# Altium PCB COIL-BOOST-10A.PcbDoc (part 4 of 5)
Units mm, origin at the board's own origin, x right, y up, seen from the top; angles counter-clockwise.
Board outline 80.1 x 100.1 mm, 4 copper layers (L1, L2, L3, L4), stack 1.512 mm thick; 282 components, 151 nets, 786 pads, 740 vias.
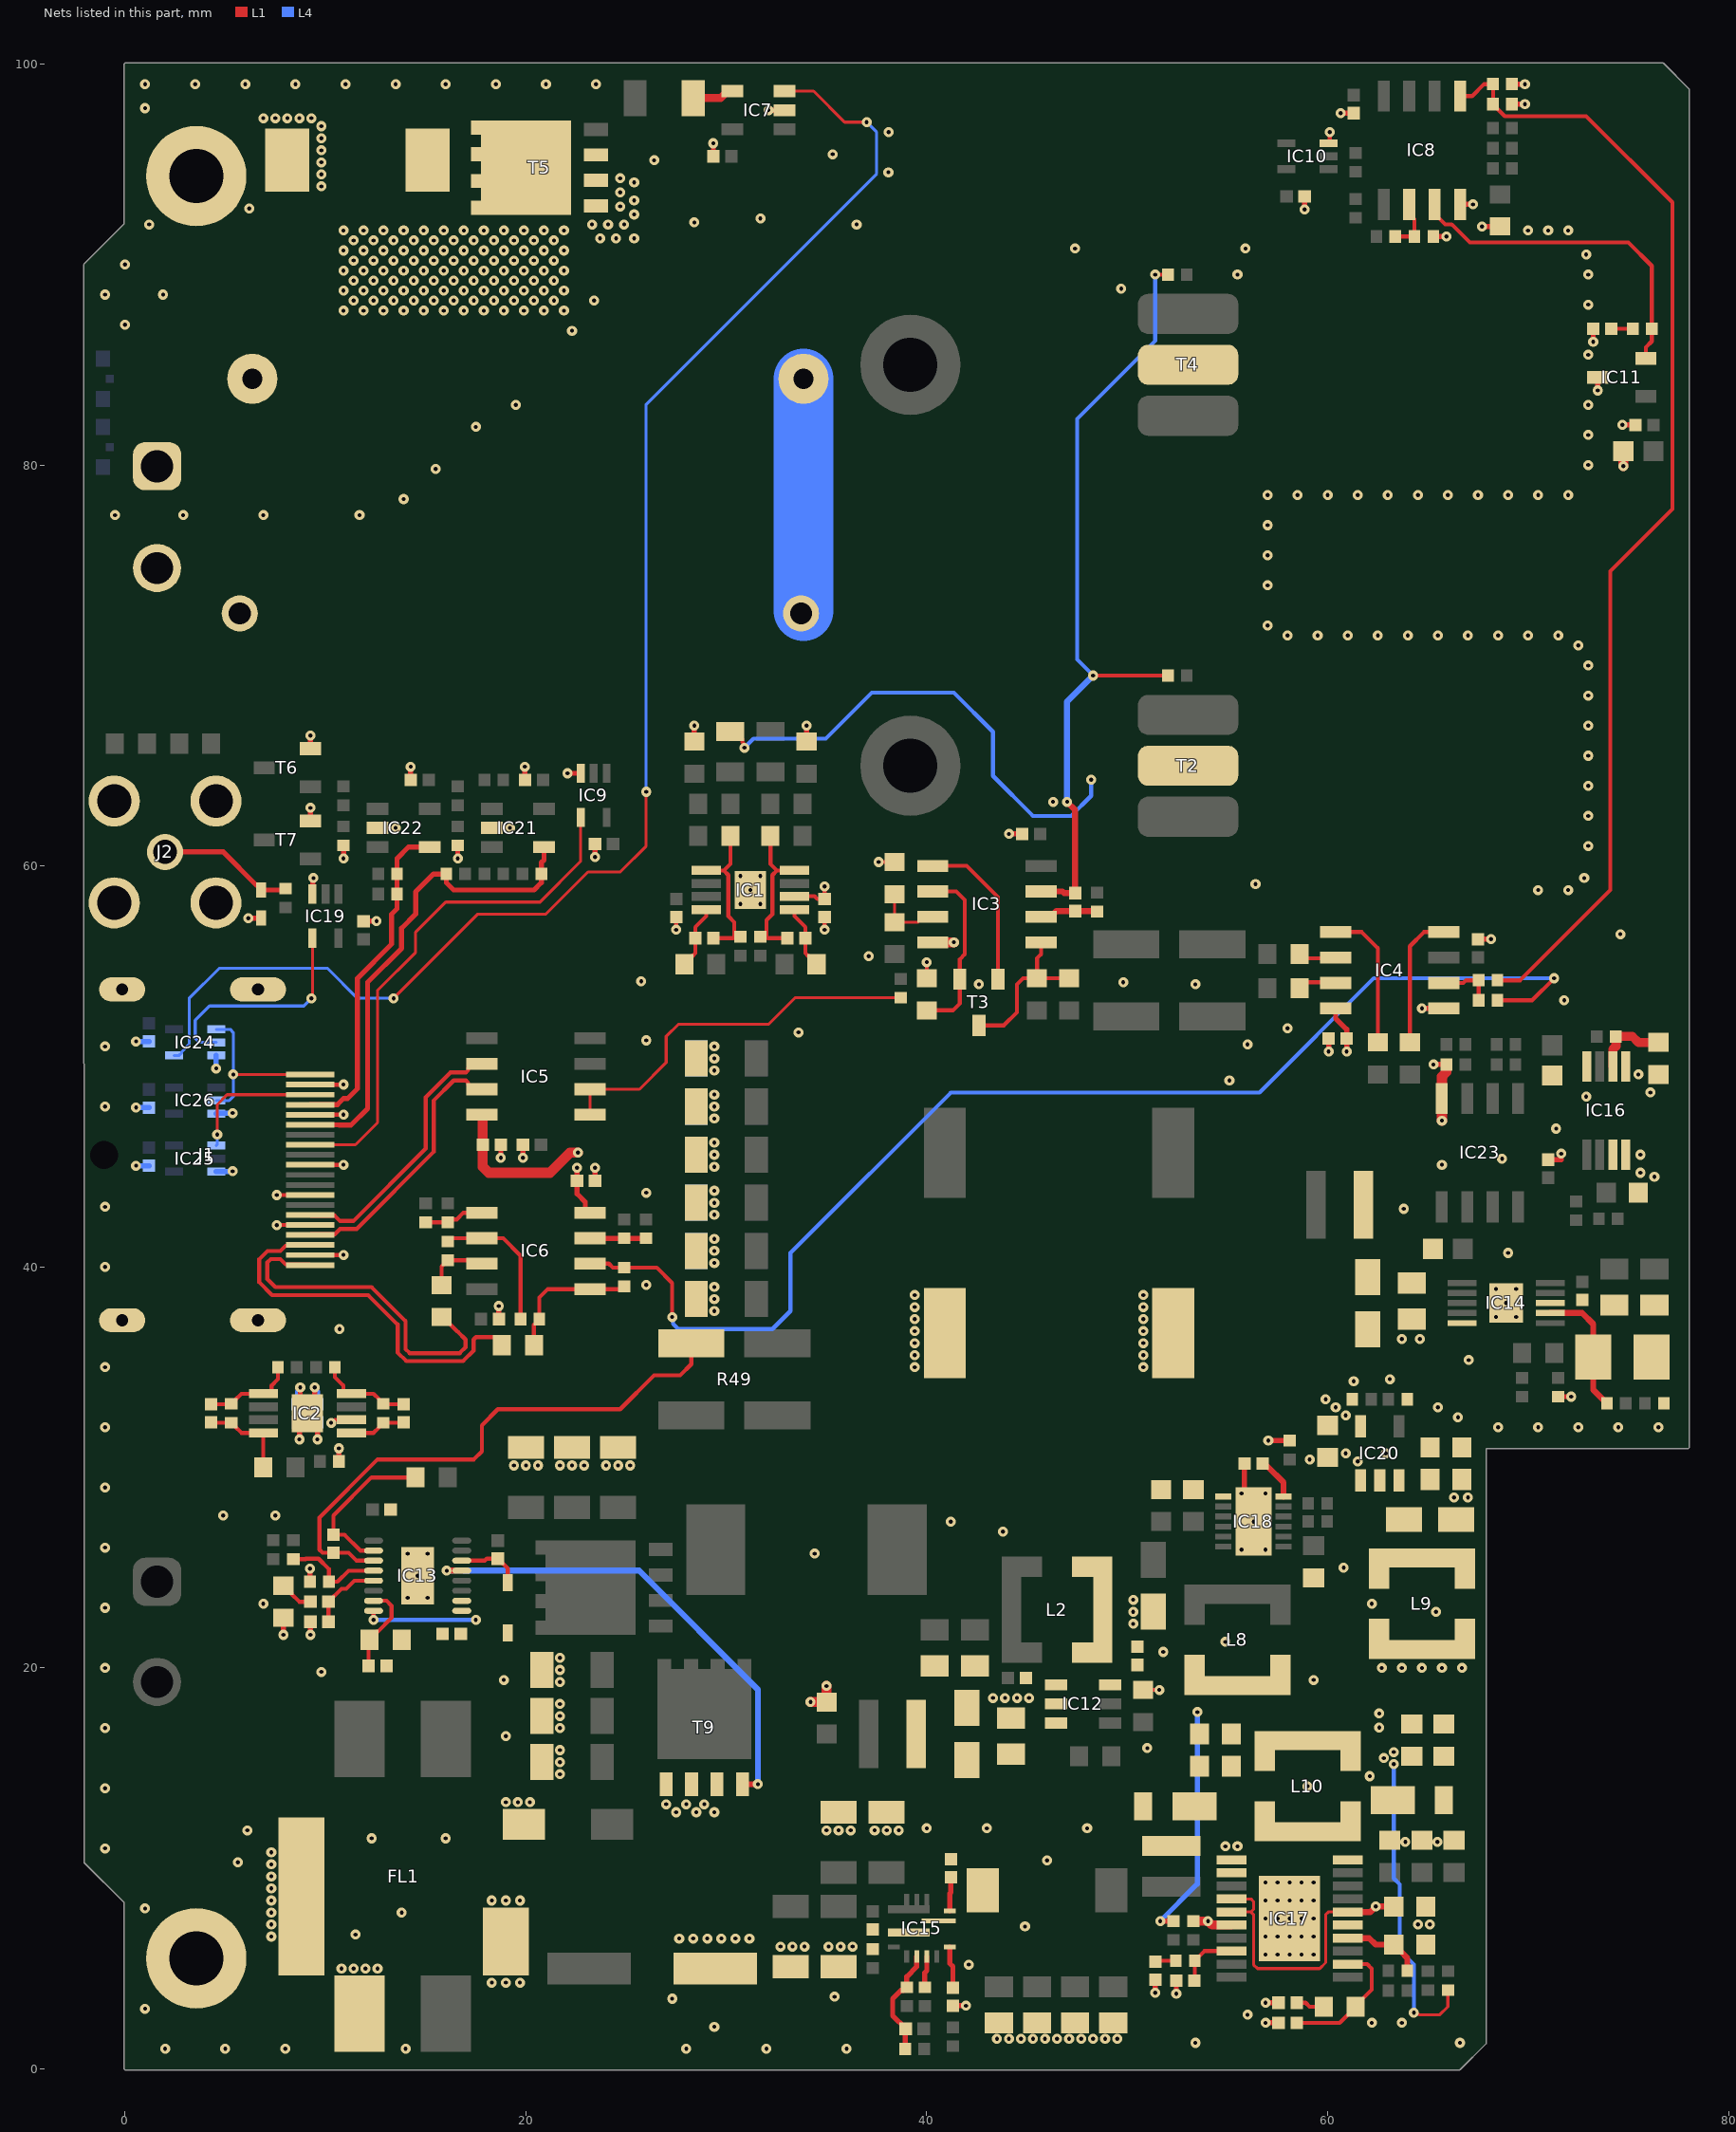
[diagram p4: the nets of this part, all layers, seen from the top]

## Part data (continued)
R55: library part R0603_44R2_0.1%_0.063W_10PPM, "Resistor - 0.1%", Case=0603, Manufacturer=GENERIC, Manufacturer1 ComponentHeight=0.5mm, Manufacturer1 Example="TYCO HOLSWORTHY", Manufacturer1 Part Number=RN73C1J44R2BTDF, Power=0.063W, Tolerance=±0.1%, Author="CERN DEM JLC", Component Type=Standard, CreateDate=12/3/2007, HelpURL=\\cern.ch\dfs\Applications\Altium\Datasheets\R0603_Tyco_RN73.pdf, LatestRevisionDate=3/13/2008, Manufacturer Part Number=R0603_44R2_0.1%_0.063W_10PPM, Mounted=Yes, Part Description="Thin Film Chip Resistor", Part Number=R0603_44R2_0.1%_0.063W_10PPM, Pin Count=2, PressFit=No, Sense=No, SMD=Yes, Socket=No, Status="Not Recommended", TC=±10ppm
R56: library part R0603_6K19_0.1%_0.063W_10PPM, "Resistor - 0.1%", Case=0603, Manufacturer=GENERIC, Manufacturer1 ComponentHeight=0.5mm, Manufacturer1 Example="TYCO HOLSWORTHY", Manufacturer1 Part Number=RN73C1J6K19BTDF, Power=0.063W, Tolerance=±0.1%, Author="CERN DEM JLC", Component Type=Standard, CreateDate=12/3/2007, HelpURL=\\cern.ch\dfs\Applications\Altium\Datasheets\R0603_Tyco_RN73.pdf, LatestRevisionDate=3/13/2008, Manufacturer Part Number=R0603_6K19_0.1%_0.063W_10PPM, Mounted=Yes, Part Description="Thin Film Chip Resistor", Part Number=R0603_6K19_0.1%_0.063W_10PPM, Pin Count=2, PressFit=No, Sense=No, SMD=Yes, Socket=No, Status="Not Recommended", TC=±10ppm
R58: library part R0402_100R_1%_0.0625W_100PPM, "Resistor - 1%", Case=0402, Manufacturer=GENERIC, Manufacturer1=Vishay, Manufacturer1 ComponentHeight=0.4mm, Manufacturer1 Part Number=RCA0402100RFKED, Power=0.0625W, Tolerance=±1%, Author="CERN DEM JLC", Component Type=Standard, CreateDate=03.12.2007, HelpURL=\\cern.ch\dfs\Applications\Altium\Datasheets\R0402_Phycomp_RC0402.pdf, LatestRevisionDate=17.10.2012, Manufacturer Part Number=R0402_100R_1%_0.0625W_100PPM, Mounted=Yes, Part Description="General Purpose Thick Film Chip Resistor", Part Number=R0402_100R_1%_0.0625W_100PPM, Pin Count=2, PressFit=No, Sense=No, SMD=Yes, Socket=No, Status="Not Recommended", TC=±100ppm/°C
R59: library part R0402_383K_1%_0.0625W, "RES 383k OHM 1% 1/16W 0402", Arena Part Number=180-000127, Case=0402, Manufacturer=GENERIC, Manufacturer 1=Yageo, Manufacturer 1 Part Number=RC0402FR-07383KL, Manufacturer 2="Stackpole Electronics", Manufacturer 2 Part Number=RMCF0402FT383K, Manufacturer 3="Vishay Dale", Manufacturer 3 Part Number=CRCW0402383KFKED, Power=0.0625W, Tolerance=1%, Author="Michal Beldyga", Component Type=Standard, CreateDate=9/16/2024, LastRevision=4/16/2025, Manufacturer Part Number=R0402_383K_1%_0.0625W, Part Number=R0402_383K_1%_0.0625W, Pin Count=2, Status=Active
R61 R63 R88: library part R0402_10K_1%_0.0625W, "RES 10k OHM 1% 1/16W 0402", Arena Part Number=180-000109, Case=0402, Manufacturer=GENERIC, Manufacturer 1=Yageo, Manufacturer 1 Part Number=RC0402FR-0710KL, Manufacturer 2="Stackpole Electronics", Manufacturer 2 Part Number=RMCF0402FT10K0, Manufacturer 3="Vishay Dale", Manufacturer 3 Part Number=CRCW040210K0FKED, Power=0.0625W, Tolerance=1%, Author="Michal Beldyga", Component Type=Standard, CreateDate=9/16/2024, LastRevision=4/16/2025, Manufacturer Part Number=R0402_10K_1%_0.0625W, Manufacturer Part Number 1=RC0402FR-0710KL, Manufacturer Part Number 2=RMCF0402FT10K0, Manufacturer Part Number 3=CRCW040210K0FKED, Part Number=R0402_10K_1%_0.0625W, Pin Count=2, Status=Active
R62: library part R0402_374K_1%_0.0625W, "RES 374k OHM 1% 1/16W 0402", Arena Part Number=180-000123, Case=0402, Manufacturer=GENERIC, Manufacturer 1=Yageo, Manufacturer 1 Part Number=RC0402FR-07374KL, Manufacturer 2="Stackpole Electronics", Manufacturer 2 Part Number=RMCF0402FT374K, Manufacturer 3="Vishay Dale", Manufacturer 3 Part Number=CRCW0402374KFKED, Power=0.0625W, Tolerance=1%, Author="Michal Beldyga", Component Type=Standard, CreateDate=9/16/2024, LastRevision=4/16/2025, Manufacturer Part Number=R0402_374K_1%_0.0625W, Part Number=R0402_374K_1%_0.0625W, Pin Count=2, Status=Active
R64 R72: library part R0402_1M91_1%_0.0625W, "RES 1M91 OHM 1% 1/16W 0402", Case=0402, Manufacturer=GENERIC, Manufacturer 1=Yageo, Manufacturer 1 Part Number=RC0402FR-071M91L, Manufacturer 2="Stackpole Electronics", Manufacturer 2 Part Number=RMCF0402FT1M91, Manufacturer 3="Vishay Dale", Manufacturer 3 Part Number=CRCW04021M91FKED, Power=0.0625W, Tolerance=1%, Author="Michal Beldyga", Component Type=Standard, CreateDate=9/16/2024, LastRevision=9/16/2024, Manufacturer Part Number=R0402_1M91_1%_0.0625W, Part Number=R0402_1M91_1%_0.0625W, Pin Count=2, Status=Active
R65 R67 R75: library part R0402_12K_1%_0.0625W_100PPM, "Resistor - 1%", Case=0402, Manufacturer=GENERIC, Manufacturer1 ComponentHeight=0.4mm, Manufacturer1 Example="YAGEO PHYCOMP", Manufacturer1 Part Number=232270671203L, Power=0.0625W, Tolerance=±1%, Author="CERN DEM JLC", Component Type=Standard, CreateDate=12/3/2007, HelpURL=\\cern.ch\dfs\Applications\Altium\Datasheets\R0402_Phycomp_RC0402.pdf, LatestRevisionDate=10/17/2012, Manufacturer Part Number=R0402_12K_1%_0.0625W_100PPM, Mounted=Yes, Part Description="General Purpose Thick Film Chip Resistor", Part Number=R0402_12K_1%_0.0625W_100PPM, Pin Count=2, PressFit=No, Sense=No, SMD=Yes, Socket=No, Status="Not Recommended", TC=±100ppm/°C
R66: library part R0402_0R_JUMPER, "Resistor", Case=0402, Manufacturer=GENERIC, Manufacturer1=Vishay, Manufacturer1 ComponentHeight=0.4mm, Manufacturer1 Part Number=CRCW04020000Z0EDC, Author="CERN DEM JLC", Component Type=Standard, CreateDate=03.12.2007, HelpURL=\\cern.ch\dfs\Applications\Altium\Datasheets\R0402_Phycomp_RC0402.pdf, LatestRevisionDate=17.10.2012, Manufacturer Part Number=R0402_0R_JUMPER, Mounted=Yes, Part Description="1A (0.05R Max DC Resistance) Zero Ohm Jumper", Part Number=R0402_0R_JUMPER, Pin Count=2, Sense=No, SMD=Yes, Socket=No, Status="Not recommended"
R68: library part R0603_7K32_0.1%_0.063W_10PPM, "Resistor - 0.1%", Case=0603, Manufacturer=GENERIC, Manufacturer1 ComponentHeight=0.5mm, Manufacturer1 Example="TYCO HOLSWORTHY", Manufacturer1 Part Number=RN73C1J7K32BTDF, Power=0.063W, Tolerance=±0.1%, Author="CERN DEM JLC", Component Type=Standard, CreateDate=12/3/2007, HelpURL=\\cern.ch\dfs\Applications\Altium\Datasheets\R0603_Tyco_RN73.pdf, LatestRevisionDate=3/13/2008, Manufacturer Part Number=R0603_7K32_0.1%_0.063W_10PPM, Mounted=Yes, Part Description="Thin Film Chip Resistor", Part Number=R0603_7K32_0.1%_0.063W_10PPM, Pin Count=2, PressFit=No, Sense=No, SMD=Yes, Socket=No, Status="Not Recommended", TC=±10ppm
R69 R71 R73 R74: library part R0402_100K_1%_0.0625W_100PPM, "Resistor - 1%", Case=0402, Manufacturer=GENERIC, Manufacturer1 ComponentHeight=0.4mm, Manufacturer1 Example="YAGEO PHYCOMP", Manufacturer1 Part Number=232270671004L, Power=0.0625W, Tolerance=±1%, Author="CERN DEM JLC", Component Type=Standard, CreateDate=12/3/2007, HelpURL=\\cern.ch\dfs\Applications\Altium\Datasheets\R0402_Phycomp_RC0402.pdf, LatestRevisionDate=10/17/2012, Manufacturer Part Number=R0402_100K_1%_0.0625W_100PPM, Mounted=Yes, Part Description="General Purpose Thick Film Chip Resistor", Part Number=R0402_100K_1%_0.0625W_100PPM, Pin Count=2, PressFit=No, Sense=No, SMD=Yes, Socket=No, Status="Not Recommended", TC=±100ppm/°C
R90: library part R0402_220R_1%_0.0625W_100PPM, "Resistor - 1%", Case=0402, Manufacturer=GENERIC, Manufacturer1 ComponentHeight=0.4mm, Manufacturer1 Example="YAGEO PHYCOMP", Manufacturer1 Part Number=232270672201L, Power=0.0625W, Tolerance=±1%, Author="CERN DEM JLC", Component Type=Standard, CreateDate=03.12.2007, HelpURL=\\cern.ch\dfs\Applications\Altium\Datasheets\R0402_Phycomp_RC0402.pdf, LatestRevisionDate=17.10.2012, Manufacturer Part Number=R0402_220R_1%_0.0625W_100PPM, Mounted=Yes, Part Description="General Purpose Thick Film Chip Resistor", Part Number=R0402_220R_1%_0.0625W_100PPM, Pin Count=2, PressFit=No, Sense=No, SMD=Yes, Socket=No, Status="Not Recommended", TC=±100ppm/°C
R109: library part R0603_52K3_0.1%_0.063W_10PPM, "Resistor - 0.1%", Case=0603, Manufacturer=GENERIC, Manufacturer1 ComponentHeight=0.5mm, Manufacturer1 Example="TYCO HOLSWORTHY", Manufacturer1 Part Number=RN73C1J52K3BTDF, Power=0.063W, Tolerance=±0.1%, Author="CERN DEM JLC", Component Type=Standard, CreateDate=12/3/2007, HelpURL=\\cern.ch\dfs\Applications\Altium\Datasheets\R0603_Tyco_RN73.pdf, LatestRevisionDate=3/13/2008, Manufacturer Part Number=R0603_52K3_0.1%_0.063W_10PPM, Mounted=Yes, Part Description="Thin Film Chip Resistor", Part Number=R0603_52K3_0.1%_0.063W_10PPM, Pin Count=2, PressFit=No, Sense=No, SMD=Yes, Socket=No, Status="Not Recommended", TC=±10ppm
SCREW3 SCREW4 SCREW5 SCREW6: library part BOSSARD_BN5687-3061587_v, "Screw", Manufacturer=BOSSARD, Manufacturer Part Number="BN5687 Art.3061587", Author="CERN DEM JLC", ClassName=Overlapping, Component Type=Mechanical, ComponentHeight=2.1mm, CreateDate=22.08.2013, HelpURL=\\cern.ch\dfs\Applications\Altium\Datasheets\BOSSARD_BN5687-3061587.pdf, LatestRevisionDate=22.08.2013, Mounted=Yes, PackageDescription="M2.5 L=4mm Hexalobular Socket Pan Head Screw, Fully Threaded - Stainless Steel A2", Part Description="M2.5 L=4mm Hexalobular Socket Pan Head Screw, Fully Threaded, Stainless Steel A2", Part Number=BOSSARD_BN5687-3061587_v, Pin Count=0, PressFit=No, Sense=No, SMD=No, Socket=No, Status=None
T2 T4: "Single P-Channel 85 V 13 mOhm 298 W Power MosFet - TO-220AB", Case/Package=TO-220-3, Continuous Drain Current (ID)=96A, Drain to Source Breakdown Voltage=-85V, Drain to Source Resistance=13mΩ, Gate to Source Voltage (Vgs)=15V, Input Capacitance=13.1nF, Manufacturer=Littelfuse, Max Operating Temperature=150°C, Max Power Dissipation=298W, Min Breakdown Voltage=85V, Min Operating Temperature=-55°C, Supplier Part Number=IXTP96P085T-ND, Category=MOSFETs, China RoHS=Compliant, ComponentLink1Description=https://datasheet.octopart.com:443/IXTP96P085T-Littelfuse-datasheet-175421089.pdf?src-supplier=IHS, ComponentLink1URL=https://datasheet.octopart.com:443/IXTP96P085T-Littelfuse-datasheet-175421089.pdf?src-supplier=IHS, ComponentLink2Description=https://datasheet.octopart.com:443/IXTP96P085T-IXYS-datasheet-56841560.pdf?src-supplier=IHS, ComponentLink2URL=https://datasheet.octopart.com:443/IXTP96P085T-IXYS-datasheet-56841560.pdf?src-supplier=IHS, ComponentLink3Description=https://datasheet.octopart.com:443/IXTP96P085T-Littelfuse-datasheet-140812709.pdf?src-supplier=Newark, ComponentLink3URL=https://datasheet.octopart.com:443/IXTP96P085T-Littelfuse-datasheet-140812709.pdf?src-supplier=Newark, ComponentLink4Description=https://datasheet.octopart.com:443/IXTP96P085T-IXYS-datasheet-11788561.pdf?src-supplier=Future+Electronics, ComponentLink4URL=https://datasheet.octopart.com:443/IXTP96P085T-IXYS-datasheet-11788561.pdf?src-supplier=Future+Electronics, ComponentLink5Description=https://datasheet.octopart.com:443/IXTP96P085T-IXYS-datasheet-178285328.pdf?src-supplier=Future+Electronics, ComponentLink5URL=https://datasheet.octopart.com:443/IXTP96P085T-IXYS-datasheet-178285328.pdf?src-supplier=Future+Electronics, ComponentLink6Description=https://datasheet.octopart.com:443/IXTP96P085T-IXYS-datasheet-130027434.pdf?src-supplier=TME, ComponentLink6URL=https://datasheet.octopart.com:443/IXTP96P085T-IXYS-datasheet-130027434.pdf?src-supplier=TME, Drain to Source Voltage (Vdss)=-85V, Element Configuration=Single, Export Control Classification Number (ECCN) Code=EAR99, Introduction Date=2018-09-12, Lead Free="Lead Free", Lifecycle Status=Production, Manufacturer Part Number=IXTP96P085T, Mounting Technology="Through Hole", Number of Elements=1, Number of Terminals=3, Pins=3, Power Dissipation=298W, Pricing="1=8.06, 50=4.3488, 100=3.9913, 500=3.36536, 1000=3.16451, 2000=3.164 (USD)", Radiation Hardening=No, Rds On Max=13mΩ, REACH SVHC=No, Reverse Recovery Time=55ns, RoHS=Compliant, Stock=4608, Supplier=DigiKey
T3: "NPN Transistor", Case=SOT23-3, Manufacturer=INFINEON, Author="CERN DEM JLC", Bonding=No, Component Type=Standard, ComponentHeight=1.1mm, CreateDate=9/23/2014, Device=BC847C, HelpURL=\\cern.ch\dfs\Applications\Altium\Datasheets\BC847C.pdf, LatestRevisionDate=9/23/2014, Manufacturer Part Number=BC847C, Mounted=Yes, PackageDescription="SOT23, 0.95mm Pitch; 3 Pin, 1.40mm W X 3.00mm L X 1.10mm H body, IPC Medium Density", Part Description="45V 100mA NPN Silicon AF Transistor", Part Number=BC847C, Pin Count=3, PressFit=No, Sense=No, SMD=Yes, Socket=No
T5: "MOSFET Transistor, N Channel, 25 A, 250 V, 0.05 ohm, 10 V, 3 V", Continuous Drain Current (ID)=25A, Drain to Source Resistance=60mΩ, Drain to Source Voltage (Vdss)=250V, Gate to Source Voltage (Vgs)=20V, Input Capacitance=1.77nF, Manufacturer=Infineon, Max Operating Temperature=150°C, Max Power Dissipation=125W, Min Operating Temperature=-55°C, Package Quantity=5000, Supplier Part Number=BSC600N25NS3GATMA1CT-ND, Category=MOSFETs, China RoHS=Non-Compliant, ComponentLink1Description=https://datasheet.octopart.com:443/BSC600N25NS3GATMA1-Infineon-datasheet-13720809.pdf?src-supplier=Newark, ComponentLink1URL=https://datasheet.octopart.com:443/BSC600N25NS3GATMA1-Infineon-datasheet-13720809.pdf?src-supplier=Newark, ComponentLink2Description=https://datasheet.octopart.com:443/BSC600N25NS3-G-Infineon-datasheet-11795221.pdf?src-supplier=Farnell, ComponentLink2URL=https://datasheet.octopart.com:443/BSC600N25NS3-G-Infineon-datasheet-11795221.pdf?src-supplier=Farnell, ComponentLink3Description=http://sigma.octopart.com:80/conflict_mineral_statement/Infineon-company-51.pdf?src-supplier=Compliance+Statements, ComponentLink3URL=http://sigma.octopart.com:80/conflict_mineral_statement/Infineon-company-51.pdf?src-supplier=Compliance+Statements, Contact Plating=Tin, Country of Origin=Malaysia, Export Control Classification Number (ECCN) Code=EAR99, Halogen Free="Halogen Free", Introduction Date=2009-10-23, Lead Free="Contains Lead", Lifecycle Status=Production, Manufacturer Part Number=BSC600N25NS3GATMA1, Max Dual Supply Voltage=250V, Min Breakdown Voltage=250V, Mounting Technology="Surface Mount", Number of Elements=1, Number of Terminals=8, On-State Resistance=60mΩ, Packaging="Tape & Reel", Pins=8, Power Dissipation=125W, Pricing="1=4.08, 10=2.681, 100=1.8868, 500=1.70212, 5000=1.39062 (USD)", REACH SVHC=No, Rise Time=10ns, RoHS=Compliant, Schedule B="8541290080, 8541290080|8541290080|8541290080|8541290080|8541290080", Stock=12980, Supplier=DigiKey
T6 T7: "N-CHANNEL MOSFET WITH DIODE", Case=SOT23-3, Manufacturer1="ON SEMICONDUCTOR", Author="CERN DEM JLC", Bonding=No, Component Type=Standard, ComponentHeight=1.11mm, CreateDate=23.03.2009, Device=BSS138LT1G, HelpURL=\\cern.ch\dfs\Applications\Altium\Datasheets\BSS138LT1G.pdf, LatestRevisionDate=23.03.2009, Manufacturer1 Part Number=BSS138LT1G, Mounted=Yes, PackageDescription="SOT23 3-Leads, Pitch 0.95mm - Body 1.4x3mm, IPC Medium Density", Part Description="50V 200mA N-Channel Enhancement Mode Field-Effect Transistor", Part Number=BSS138LT1G, Pin Count=3, PressFit=No, Sense=No, SMD=Yes, Socket=No
T8 T9: "30V 80A N-Channel OptiMOS 3 Power-MOSFET", Manufacturer=INFINEON, Author="CERN DEM JLC", Bonding=No, Component Type=Standard, ComponentHeight=1.1mm, CreateDate=11/3/2016, Device=BSC050N03LSGATMA1, HelpURL=\\cern.ch\dfs\Applications\Altium\Datasheets\BSC050N03LSGATMA1.pdf, LatestRevisionDate=11/29/2018, Manufacturer Part Number=BSC050N03LSGATMA1, Mounted=Yes, PackageDescription="TDSON, 8-Leads, Body 6.15x5.15mm, Pitch 1.27mm", Part Description="30V 80A N-Channel OptiMOS 3 Power-MOSFET", Part Number=BSC050N03LSGATMA1, Pin Count=8, PressFit=No, Sense=No, SMD=Yes, Socket=No

## Via types
v1: diameter 0.5, hole 0.2, L1 to L4, tented both sides, 720 vias
v2: diameter 0.65, hole 0.4, L1 to L4, tented both sides, 20 vias

## Nets (pads, with @x,y where several pads share a name; then routed paths per layer and width w, separated by ;. In a path a pad name is that pad's centre, name@x,y a point inside that pad or via, vN(x,y) a via of type N, cw(c..) or ccw(c..) an arc to the next point about the centre after c; other vN are vias at no path point)
ADP_COMP1: C78.2 IC17.8 R67.2 | length 3
  L1 w0.2: C78.2@53.35,4.4 53.37,4.42 R67.2@53.37,5.4 53.37,5.42 53.56,5.61 53.58,5.61 53.845,5.875 IC17.8@55.2,5.875
ADP_COMP2: C79.2 IC17.12 R68.2 | length 6.8
  L1 w0.2: C79.2@58.45,2.3 60.6,2.3 61,2.7 61.05,2.7 61.4,3.05 R68.2@61.4,3.1 61.4,3.15 62.2,3.95 62.2,5 61.975,5.225 IC17.12@61,5.225
ADP_VREG: C84.2 IC17.4 IC17.5 IC17.16 | length 15.2
  L1 w0.15: IC17.5@55.2,7.825 56.175,7.825 ; IC17.4@55.2,8.475 56.175,8.475 56.3,8.35 56.3,7.95 56.175,7.825 ; IC17.16@61,7.825 60.025,7.825 59.9,7.7 59.9,5.3 59.6,5 56.5,5 56.3,5.2 56.3,7.7 56.175,7.825
  L1 w0.3: IC17.16@61,7.825 62.125,7.825 v1(62.4,8.1) C84.2@63.3,8.1
BG: IC13.13 T9.4 | length 24.2
  L1 w0.3: v1(16.05,24.85) IC13.13@16.8,24.85 ; T9.4@30.805,14.2 v1(31.575,14.2)
  L4 w0.3: v1(16.05,24.85) 25.65,24.85 31.575,18.925 v1(31.575,14.2)
BOOST: C32.2 D2.1 IC13.14 | length 3.2
  L1 w0.2: IC13.14@16.8,25.35 17.95,25.35 18.05,25.45 C32.2@18.6,25.45 19.1,24.95 D2.1@19.1,24.25
BOOSTER_EN: IC25.1 J1.18 | length 6.9
  L1 w0.15: v1(4.6,46.6) 4.6,48.1 5.093,48.593 J1.18@9.237,48.593
  L4 w0.15: IC25.1@4.55,46.05 4.6,46.1 v1(4.6,46.6)
BUCK_FB: IC13.4 R106.1 R108.2 | length 5.1
  L1 w0.2: R106.1@8.4,25.43 9.003,25.43 9.023,25.45 9.655,25.45 10.17,24.935 R108.2@10.17,24.3 10.6,24.3 11.15,24.85 IC13.4@12.4,24.85
CABLE_DIR: IC22.4 J1.17 R81.1 R82.2 | length 16.9
  L1 w0.25: J1.17@9.237,48.093 10.593,48.093 10.9,48.4 11.1,48.4 11.6,48.9 11.6,54.4 13.3,56.1 13.3,57.6 13.57,57.87 R81.1@13.57,58.6 R82.2@13.57,59.6 13.57,60.37 14.15,60.95 IC22.4@15.2,60.95
CABLE_ROLE: IC21.4 J1.15 R77.1 R78.2 | length 24.2
  L1 w0.25: J1.15@9.237,47.093 10.665,47.093 10.683,47.075 11.275,47.075 12.1,47.9 12.1,54.2 13.8,55.9 13.8,56.9 14.5,57.6 14.5,58.7 15.4,59.6 R78.2@16.03,59.6 16.03,59.17 16.4,58.8 20.4,58.8 20.77,59.17 R77.1@20.77,59.6 20.77,60.17 20.9,60.3 IC21.4@20.9,60.95
COIL_DISCHARGE: IC7.3 IC24.4 | length 76.3
  L1 w0.15: v1(13.4,53.4) 17.6,57.6 21,57.6 23.1,59.7 24.7,59.7 26,61 v1(26,63.7) ; IC7.3@32.9,98.65 34.35,98.65 35.9,97.1 v1(37,97.1)
  L4 w0.15: IC24.4@2.45,50.55 2.7,50.55 2.825,50.675 2.825,50.725 3.2,51.1 3.2,53.4 4.7,54.9 10.1,54.9 11.6,53.4 v1(13.4,53.4) ; v1(26,63.7) 26,83.028 37.5,94.528 37.5,96.6 v1(37,97.1)
DP_KILL: IC24.1 IC26.2 J1.20 | length 8.9
  L1 w0.15: v1(5.4,49.6) 5.407,49.593 J1.20@9.237,49.593
  L4 w0.15: IC26.2@4.55,48.3 5.2,48.3 5.4,48.5 v1(5.4,49.6) 5.4,51.7 5.25,51.85 IC24.1@4.55,51.85
EXT_IN: D6.1 J2.1 R90.2 | length 6.9
  L1 w0.254: J2.1@2,60.7 4.9,60.7 6.552,59.048 6.677,59.048 6.8,58.925 D6.1@6.8,58.8 7.93,58.8 R90.2@8,58.87
EXT_KILL: IC19.4 IC24.2 | length 11.3
  L1 w0.15: v1(9.3,53.4) 9.35,53.45 IC19.4@9.35,56.4
  L4 w0.15: IC24.2@4.55,51.2 3.7,51.2 3.5,51.4 3.5,52.3 4.218,53.018 8.918,53.018 v1(9.3,53.4)
FAULT: IC9.4 J1.13 | length 26
  L1 w0.15: J1.13@9.237,46.093 11.493,46.093 12.6,47.2 12.6,53.8 14.5,55.7 14.5,56.7 16,58.2 20.7,58.2 22.729,60.229 IC9.4@22.729,62.425
GND: B1.1 B2.1 C2.1 C3.1 C5.1 C8.1 C9.1 C10.1 C11.1 C12.2 C13.1 C15.1 C16.2 C17.1 C18.1 C19.1 C20.1 C21.1 C22.1 C23.1 C24.1 C25.1 C26.1 C27.2 C28.1 C29.1 C30.1 C31.1 C33.1 C34.2 C35.2 C36.1 C37.1 C38.1 C39.1 C40.1 C41.2 C42.1 C43.2 C44.1 C45.1 C46.1 C47.1 C48.1 C51.1 C52.1 C53.1 C54.1 C55.1 C56.1 C58.1 C59.1 C60.1 C61.1 C62.2 C63.1 C64.1 C65.1 C66.1 C68.1 C69.2 C70.2 C71.1 C72.1 C73.1 C74.1 C75.1 C76.1 C77.1 C78.1 C79.1 C80.1 C81.1 C82.1 C83.1 C84.1 C85.1 C86.1 C87.1 C88.1 C89.1 C90.1 C91.1 C92.1 C93.1 C94.1 C95.1 C96.1 C97.1 C98.1 C99.1 C100.1 C101.1 C102.1 C103.1 C104.1 C105.1 C107.1 C108.1 D1.2 D5.2 D6.2 FL1.4 IC1.9 IC2.9 IC3.4 IC4.5 IC7.2 IC8.4 IC9.3 IC10.3 IC11.3 IC12.1 IC13.17 IC14.5 IC14.8 IC14.11 IC15.3 IC15.9 IC16.3 IC16.4 IC16.5 IC16.8 IC17.1 IC17.6 IC17.15 IC17.21 IC18.7 IC18.13 IC19.3 IC20.1 IC21.2 IC22.2 IC23.4 IC24.3 IC25.3 IC26.3 J1.2 J1.5 J1.8 J1.11 J1.16 J1.19 J1.SHIELD J2.2 J2.3 J2.4 J2.5 L10.2 R15.1 R26.1 R30.1 R37.1 R38.1 R39.1 R41.1 R47.1 R48.1 R51.2 R52.1 R56.1 R62.1 R63.1 R69.1 R76.1 R80.1 R84.1 R89.1 R93.1 R97.1 R108.1 R110.1 T5.1 T5.2 T5.3 T6.2 T7.2 T9.1 T9.2 T9.3 | length 71.2
  L1 w0.2: v1(7.574,42.086) 7.581,42.093 J1.5@9.237,42.093 ; v1(7.574,43.586) 7.581,43.593 J1.8@9.237,43.593 ; J1.2@9.237,40.593 10.893,40.593 v1(10.9,40.6) ; J1.11@9.237,45.093 10.893,45.093 v1(10.9,45.1) ; J1.16@9.237,47.593 10.893,47.593 v1(10.9,47.6) ; J1.19@9.237,49.093 10.893,49.093 v1(10.9,49.1) ; IC22.2@12.6,61.9 v1(13.5,61.9) ; IC21.2@18.3,61.9 v1(19.2,61.9) ; v1(27.5,56.82) C103.1@27.5,57.45 ; v1(34.9,56.82) C105.1@34.9,57.45 ; v1(37.6,60.2) R26.1@38.4,60.2 ; R30.1@40,54.4 v1(40,55.2) ; R47.1@50.8,18.9 v1(51.6,18.9) ; IC10.3@60.05,96.05 60.1,96.1 v1(60.1,96.6)
  L1 w0.25: v1(32.1,97.7) IC7.2@32.9,97.7
  L1 w0.254: v1(6.15,57.4) D6.2@6.8,57.4 ; v1(7.9,21.65) R56.1@7.9,22.5 ; v1(8.7,31.4) 8.7,32.3 IC2.9@9.1,32.7 ; v1(8.741,33.993) 8.741,33.059 IC2.9@9.1,32.7 ; R108.1@9.23,24.3 v1(9.23,24.95) ; v1(9.25,21.65) C51.1@9.25,22.3 ; T7.2@9.25,62.25 v1(9.25,62.9) ; T6.2@9.25,65.85 v1(9.25,66.5) ; IC19.3@9.35,58.6 9.375,58.625 9.375,59.375 v1(9.4,59.4) ; v1(9.459,33.993) 9.459,33.059 IC2.9@9.1,32.7 ; v1(9.6,31.4) 9.6,32.2 IC2.9@9.1,32.7 ; R110.1@10.67,30.3 v1(10.67,30.95) ; v1(10.9,60.38) R84.1@10.9,61.03 ; C48.1@11.9,57.25 v1(12.55,57.25) ; C101.1@14.25,64.3 v1(14.25,64.95) ; v1(16.6,60.38) R80.1@16.6,61.03 ; C94.1@18.65,37.4 v1(18.65,38.05) ; v1(18.75,45.45) C97.1@18.75,46.1 ; v1(19.85,45.45) C96.1@19.85,46.1 ; C98.1@19.95,64.3 v1(19.95,64.95) ; v1(22.079,64.625) IC9.3@22.729,64.625 ; C95.1@23.45,44.3 v1(23.45,44.95) ; v1(23.45,60.45) C9.1@23.45,61.1 ; R97.1@28.4,66.2 v1(28.4,67) ; C8.1@29.35,95.4 v1(29.35,96.05) ; R15.1@34,66.2 v1(34,67) ; R63.1@39.9,4.07 39.9,4.8 40,4.9 IC15.3@40,5.61 ; C69.2@41.3,3.15 v1(41.95,3.15) ; v1(44.1,61.6) C5.1@44.75,61.6 ; v1(51.4,3.8) C80.1@51.4,4.45 ; v1(52.45,3.75) C78.1@52.45,4.4 ; v1(55.7,28.7) 55.85,28.85 C82.1@55.85,30.2 ; v1(56.9,2.3) C79.1@57.55,2.3 ; v1(56.9,3.3) C81.1@57.55,3.3 ; v1(57.04,31.34) R93.1@58.1,31.34 ; v1(58.85,92.75) C99.1@58.85,93.4 ; v1(60.05,50.75) C3.1@60.05,51.4 ; v1(60.65,97.55) C100.1@61.3,97.55 ; v1(64.7,52.9) 64.702,52.898 65.798,52.898 IC4.5@65.8,52.895 ; R41.1@65.27,91.4 v1(65.92,91.4) ; v1(65.28,50.1) R89.1@65.93,50.1 ; IC8.4@66.605,93 v1(67.255,93) ; C2.1@67.5,56.35 v1(68.15,56.35) ; v1(67.7,91.9) R37.1@68.6,91.9 ; R39.1@69.19,98 v1(69.84,98) ; R38.1@69.19,99 v1(69.84,99) ; C102.1@71,45.35 71.65,45.35 ; R52.1@71.5,33.53 v1(72.15,33.53) ; v1(73.25,86.15) C13.1@73.25,86.8 ; v1(73.475,83.721) IC11.3@73.475,84.371 ; v1(74.7,82) C11.1@75.35,82
  L1 w0.45: R69.1@53.3,7.37 v1(54.03,7.37) 54.225,7.175 IC17.6@55.2,7.175
  L1 w0.5: v1(34.2,18.3) C15.1@35,18.3 v1(35,19.1) ; IC3.4@40.3,56.195 v1(41.35,56.195) ; IC23.4@65.695,48.4 IC23.4@65.7,48.405 ; v1(65.7,47.3) IC23.4@65.7,48.405 ; R89.1@65.93,50.1 65.93,49.73 65.7,49.5 IC23.4@65.7,48.405 ; v1(74.75,79.95) C10.1@74.75,80.7
  L4 w0.254: v1(0.55,45.05) C56.1@1.2,45.05 ; v1(0.55,47.95) C104.1@1.2,47.95 ; v1(0.55,51.25) C40.1@1.2,51.25 ; IC25.3@4.55,44.75 4.563,44.763 5.363,44.763 v1(5.375,44.775) ; IC26.3@4.55,47.65 4.563,47.663 5.363,47.663 v1(5.375,47.675) ; v1(4.55,49.9) IC24.3@4.55,50.55 ; C107.1@8.6,33.15 8.6,33.785 8.741,33.927 v1(8.741,33.993) ; v1(9.459,33.993) 9.459,33.927 9.6,33.785 C108.1@9.6,33.15
  other v1: 2,1 5,1 8,1 14,1 28,1 32,1 36,1 53.4,1.3 66.6,1.3 43.5,1.5 44.1,1.5 44.7,1.5 45.3,1.5 45.9,1.5 46.5,1.5 47.1,1.5 47.7,1.5 48.3,1.5 48.9,1.5 49.5,1.5 29.4,2.1 62.2,2.3 63.7,2.3 56,2.7 1,3 27.3,3.5 35.4,3.6 18.3,4.3 19,4.3 19.7,4.3 10.8,5 11.4,5 12,5 12.6,5 42.1,5.2 56.9,5.7 57.5,5.7 58.1,5.7 58.7,5.7 59.3,5.7 32.7,6.1 33.3,6.1 33.9,6.1 35.1,6.1 35.7,6.1 36.3,6.1 27.65,6.5 28.35,6.5 29.05,6.5 29.75,6.5 30.45,6.5 31.15,6.5 7.3,6.6 56.9,6.6 57.5,6.6 58.1,6.6 58.7,6.6 59.3,6.6 11.5,6.7 44.9,7.1 7.3,7.2 64.5,7.2 65.1,7.2 56.9,7.5 57.5,7.5 58.1,7.5 58.7,7.5 59.3,7.5 7.3,7.8 13.8,7.8 1,8 7.3,8.4 18.3,8.4 19,8.4 19.7,8.4 56.9,8.4 57.5,8.4 58.1,8.4 58.7,8.4 59.3,8.4 7.3,9 56.9,9.3 57.5,9.3 58.1,9.3 58.7,9.3 59.3,9.3 7.3,9.6 7.3,10.2 5.629,10.303 46,10.4 7.3,10.8 -1,11 54.9,11.1 55.5,11.1 63.875,11.325 65.475,11.325 12.3,11.5 16,11.5 6.1,11.9 35,11.9 35.6,11.9 36.2,11.9 37.4,11.9 38,11.9 38.6,11.9 40,12 43,12 48,12 27.5,12.8 28.5,12.8 29.4,12.8 27,13.2 28,13.2 28.9,13.2 19,13.3 19.6,13.3 20.2,13.3 -1,14 59,14.1 62.1,14.6 21.7,14.7 21.7,15.3 21.7,15.9 51,16 19,16.6 -1,17 21.7,17 62.575,17.025 21.7,17.6 62.575,17.725 21.7,18.2 43.3,18.5 43.9,18.5 44.5,18.5 45.1,18.5 21.7,19.3 18.9,19.4 59.3,19.4 9.8,19.8 21.7,19.9 -1,20 21.7,20.5 51.8,20.8 54.9,21.3 50.3,22.2 50.3,22.8 65.4,22.8 -1,23 6.9,23.2 62.2,23.2 50.3,23.4 14.1,23.5 15.1,23.5 14.6,24.6 60.8,25 14.1,25.7 15.1,25.7 34.4,25.7 55.7,25.9 56.9,25.9 -1,26 43.8,26.8 41.2,27.3 56.3,27.3 4.9,27.6 7.5,27.6 66.3,28.5 67,28.5 56.9,28.7 -1,29 19.4,30.1 20,30.1 20.6,30.1 21.7,30.1 22.3,30.1 22.9,30.1 24,30.1 24.6,30.1 25.2,30.1 61.5,30.3 59.1,30.4 60.9,30.7 62.9,30.7 -1,32 68.5,32 70.5,32 72.5,32 74.5,32 76.5,32 66.5,32.5 65.5,33 61.3,34.3 63.1,34.4 -1,35 39.4,35 50.8,35 67.036,35.358 39.4,35.6 50.8,35.6 39.4,36.2 50.8,36.2 63.7,36.4 64.6,36.4 39.4,36.8 50.8,36.8 10.7,36.9 39.4,37.4 50.8,37.4 68.4,37.5 69.4,37.5 29.4,37.8 39.4,38 50.8,38 68.9,38.2 29.4,38.4 39.4,38.6 50.8,38.6 68.4,38.9 69.4,38.9 29.4,39 26,39.1 -1,40 29.4,40.2 69,40.7 29.4,40.8 29.4,41.4 29.4,42.6 63.8,42.9 -1,43 29.4,43.2 26,43.7 29.4,43.8 76.3,44.5 75.6,44.7 29.4,45 65.7,45.1 68.7,45.4 29.4,45.6 75.6,45.6 71.65,45.65 29.4,46.2 71.4,46.9 29.4,47.4 -1,48 29.4,48 72.9,48.5 29.4,48.6 76.1,48.7 55.1,49.3 75.5,49.6 29.4,49.8 29.4,50.4 -1,51 29.4,51 56,51.1 26,51.3 33.6,51.7 58,51.9 71.8,53.3 42.6,54.1 53.4,54.1 49.8,54.2 25.75,54.25 37.1,55.5 74.6,56.6 30.7,58.1 31.7,58.1 31.2,58.8 70.5,58.8 72,58.8 56.4,59.1 72.8,59.4 30.7,59.5 31.7,59.5 73,61 73,62.5 46.3,63.2 73,64 73,65.5 73,67 73,68.5 73,70 72.5,71 58,71.5 59.5,71.5 61,71.5 62.5,71.5 64,71.5 65.5,71.5 67,71.5 68.5,71.5 70,71.5 71.5,71.5 57,72 57,74 57,75.5 57,77 -0.5,77.5 2.9,77.5 6.9,77.5 11.7,77.5 13.9,78.3 57,78.5 58.5,78.5 60,78.5 61.5,78.5 63,78.5 64.5,78.5 66,78.5 67.5,78.5 69,78.5 70.5,78.5 72,78.5 15.5,79.8 73,80 73,81.5 17.5,81.9 19.5,83 73,83 73,85.5 22.3,86.7 0,87 73,88 23.4,88.2 -1,88.5 1.9,88.5 49.7,88.8 55.5,89.5 73,89.5 0,90 72.9,90.5 47.4,90.8 55.9,90.8 23.7,91.3 24.5,91.3 25.4,91.3 70,91.7 71,91.7 72,91.7 1.2,92 23.3,92 24.1,92 24.9,92 36.5,92 28.4,92.1 31.7,92.3 25.4,92.5 6.2,92.8 24.7,92.9 25.4,93.2 24.7,93.6 9.8,93.9 25.4,94.1 24.7,94.3 9.8,94.5 38.084,94.6 9.8,95.1 26.4,95.2 35.3,95.5 9.8,95.7 9.8,96.3 38.1,96.6 9.8,96.9 6.9,97.3 7.5,97.3 8.1,97.3 8.7,97.3 9.3,97.3 1,97.8 1,99 3.5,99 6,99 8.5,99 11,99 13.5,99 16,99 18.5,99 21,99 23.5,99
I_OUT_N: C7.1 D1.1 P2.1 T5.D
  other v1: 10.9,87.7 11.9,87.7 12.9,87.7 13.9,87.7 14.9,87.7 15.9,87.7 16.9,87.7 17.9,87.7 18.9,87.7 19.9,87.7 20.9,87.7 21.9,87.7 11.4,88.2 12.4,88.2 13.4,88.2 14.4,88.2 15.4,88.2 16.4,88.2 17.4,88.2 18.4,88.2 19.4,88.2 20.4,88.2 21.4,88.2 10.9,88.7 11.9,88.7 12.9,88.7 13.9,88.7 14.9,88.7 15.9,88.7 16.9,88.7 17.9,88.7 18.9,88.7 19.9,88.7 20.9,88.7 21.9,88.7 11.4,89.2 12.4,89.2 13.4,89.2 14.4,89.2 15.4,89.2 16.4,89.2 17.4,89.2 18.4,89.2 19.4,89.2 20.4,89.2 21.4,89.2 10.9,89.7 11.9,89.7 12.9,89.7 13.9,89.7 14.9,89.7 15.9,89.7 16.9,89.7 17.9,89.7 18.9,89.7 19.9,89.7 20.9,89.7 21.9,89.7 11.4,90.2 12.4,90.2 13.4,90.2 14.4,90.2 15.4,90.2 16.4,90.2 17.4,90.2 18.4,90.2 19.4,90.2 20.4,90.2 21.4,90.2 10.9,90.7 11.9,90.7 12.9,90.7 13.9,90.7 14.9,90.7 15.9,90.7 16.9,90.7 17.9,90.7 18.9,90.7 19.9,90.7 20.9,90.7 21.9,90.7 11.4,91.2 12.4,91.2 13.4,91.2 14.4,91.2 15.4,91.2 16.4,91.2 17.4,91.2 18.4,91.2 19.4,91.2 20.4,91.2 21.4,91.2 10.9,91.7 11.9,91.7 12.9,91.7 13.9,91.7 14.9,91.7 15.9,91.7 16.9,91.7 17.9,91.7 18.9,91.7 19.9,91.7 20.9,91.7 21.9,91.7
I_OUT_P: P2.2 R28.2 R96.1 T2.2 T4.2 | length 24.7
  L1 w0.2: R96.1@30.2,66.7 30.425,66.7 30.8,66.325 30.8,66.181 30.843,66.139 30.843,65.957 v1(30.9,65.9)
  L4 w0.2: v1(30.9,65.9) 31.35,66.35 34.955,66.35 37.255,68.65 41.345,68.65 43.3,66.695 43.3,64.495 45.295,62.5 47.2,62.5 48.2,63.5 v1(48.2,64.3)
IMON_N: J1.3 R9.2 | length 19.6
  L1 w0.2: J1.3@9.237,41.093 9.197,41.053 8.003,41.053 7.743,40.793 7.105,40.793 6.7,40.388 6.7,39.234 7.334,38.6 12.134,38.6 13.6,37.134 13.6,35.734 14.034,35.3 16.866,35.3 17.39,35.825 17.39,36.383 17.508,36.5 18.45,36.5 18.8,36.15 R9.2@18.8,36.1
IMON_P: J1.1 R27.2 | length 17.6
  L1 w0.2: J1.1@9.237,40.093 9.197,40.133 8.003,40.133 7.743,40.393 7.271,40.393 7.1,40.222 7.1,39.4 7.5,39 12.3,39 14,37.3 14,35.9 14.2,35.7 16.7,35.7 16.99,35.99 16.99,36.383 16.607,36.766 16.584,36.766 15.85,37.5 R27.2@15.8,37.5
INTVCC: C43.1 D2.2 IC13.8 IC13.9 IC13.10 | length 5.5
  L1 w0.2: v1(12.4,22.4) IC13.8@12.4,22.85
  L4 w0.2: v1(12.4,22.4) v1(17.5,22.4)
ISET: IC3.3 R24.2 R26.2 | length 3.4
  L1 w0.15: R26.2@38.4,58.6 R24.2@38.4,57.2 39.56,57.2 39.825,57.465 IC3.3@40.3,57.465
ISET_N: IC5.2 J1.6 | length 13.5
  L1 w0.2: J1.6@9.237,42.593 9.277,42.553 10.471,42.553 10.731,42.293 11.393,42.293 15,45.9 15,48.466 16.234,49.7 17.008,49.7 17.125,49.817 17.125,49.935 17.325,50.135 IC5.2@17.8,50.135
ISET_P: IC5.3 J1.4 | length 13.5
  L1 w0.2: J1.4@9.237,41.593 9.277,41.633 10.471,41.633 10.731,41.893 11.559,41.893 15.4,45.734 15.4,48.3 16.4,49.3 17.008,49.3 17.125,49.183 17.125,49.065 17.325,48.865 IC5.3@17.8,48.865
N15V0: C3.2 C85.2 C95.2 C97.2 C105.2 C108.2 IC1.6 IC2.6 IC4.4 IC5.4 IC6.4 IC20.5 R75.2 | length 16.1
  L1 w0.2: v1(10.285,32.225) 10.325,32.225 10.475,32.375 IC2.6@11.3,32.375 ; IC1.6@33.4,58.475 33.425,58.5 34.4,58.5 34.55,58.35 C105.2@34.9,58.35 v1(34.9,58.98)
  L1 w0.254: v1(22.55,44.95) C95.2@22.55,44.3 22.55,43.65 22.963,43.237 22.963,42.878 23.136,42.705 IC6.4@23.2,42.705 ; IC4.4@60.4,52.895 60.4,52.4 60.95,51.85 C3.2@60.95,51.4 v1(60.95,50.75)
  L1 w0.5: IC5.4@17.8,47.595 17.85,47.545 17.85,44.993 18.143,44.7 21.2,44.7 22.208,45.708 22.592,45.708 v1(22.6,45.7)
  other v1: 60.9,32.6 60.4,33 59.9,33.4
N16V0: C88.2 C89.2 C90.2 IC20.2 IC20.3 L9.2
NetC1_1: C1.1 IC1.8 R1.1 R57.2 | length 7.3
  L1 w0.2: R57.2@32.2,61.5 32.2,60.1 32.525,59.775 ; C1.1@33.05,56.4 32.07,56.4 32,56.47 32,57.3 32.3,57.6 32.3,59.55 32.525,59.775 ; IC1.8@33.4,59.775 32.525,59.775
NetC1_2: C1.2 IC1.5 R17.1 | length 3.2
  L1 w0.2: IC1.5@33.4,57.825 33.4,57.5 33.95,56.95 C1.2@33.95,56.4 33.95,55.65 34.1,55.5 34.15,55.5 34.5,55.15 R17.1@34.5,55.1
NetC4_1: C4.1 IC1.1 R95.2 R99.1 | length 7.3
  L1 w0.2: IC1.1@29,59.775 29.875,59.775 ; C4.1@29.35,56.4 30.33,56.4 30.4,56.47 30.4,57.2 30.1,57.5 30.1,59.55 29.875,59.775 ; R95.2@30.2,61.5 30.2,60.1 29.875,59.775
NetC4_2: C4.2 IC1.4 R98.1 | length 3.2
  L1 w0.2: R98.1@27.9,55.1 27.9,55.15 28.25,55.5 28.3,55.5 28.45,55.65 C4.2@28.45,56.4 28.45,56.95 29,57.5 IC1.4@29,57.825
NetC6_1: C6.1 IC3.7 R20.1 R22.1 | length 39.6
  L1 w0.2: v1(48.3,69.5) R22.1@52.03,69.5 ; v1(51.4,89.5) R20.1@52.03,89.5
  L1 w0.3: IC3.7@45.7,58.735 46.765,58.735 46.85,58.65 C6.1@47.4,58.65 47.4,62.8 v1(47,63.2)
  L4 w0.2: v1(48.3,69.5) 47.5,70.3 47.5,82.3 51.4,86.2 v1(51.4,89.5)
  L4 w0.3: v1(47,63.2) 47,68.2 v1(48.3,69.5)
NetC6_2: C6.2 IC3.6 R12.1 | length 2.9
  L1 w0.3: IC3.6@45.7,57.465 46.175,57.465 46.46,57.75 C6.2@47.4,57.75 48.48,57.75 R12.1@48.5,57.73
NetC7_2: C7.2 R28.1 | length 11.6
  L4 w3: R28.1@33.85,72.725 C7.2@33.85,84.3
NetC13_2: C13.2 R43.1 | length 1.1
  L1 w0.2: C13.2@74.15,86.8 R43.1@75.23,86.8
NetC14_1: C14.1 IC12.6
NetC14_2: C14.2 IC12.2 L2.1
NetC16_1: C16.1 C17.2 IC12.3 L1.2
NetC27_1: C27.1 C28.2 L3.2 L4.1
NetC33_2: C33.2 IC13.7 R48.2 | length 4.5
  L1 w0.2: C33.2@12.15,20.1 12.15,21.35 R48.2@12.2,21.4 ; R48.2@12.2,21.45 12.55,21.8 12.6,21.8 13.3,22.5 13.3,23.1 13.05,23.35 IC13.7@12.4,23.35
NetC41_1: C41.1 IC14.7 R50.1 | length 6.6
  L1 w0.3: IC14.7@71.1,37.7 72.7,37.7 73.25,37.15 C41.1@73.25,35.5 73.25,33.88 73.77,33.36 73.79,33.36 73.93,33.22 R50.1@73.93,33.2
NetC49_1: C49.1 IC13.3 R49.V1 | length 28.1
  L1 w0.2: IC13.3@12.4,25.35 11.55,25.35 11.15,25.75 C49.1@10.4,25.75 9.85,25.75 9.7,25.9 9.7,27.5 12.6,30.4 17.4,30.4 17.8,30.8 17.8,32.1 18.6,32.9 24.7,32.9 26.4,34.6 27.7,34.6 28.25,35.15 R49.V1@28.25,36.2
NetC49_2: C49.2 IC13.2 R55.1 | length 8.2
  L1 w0.2: IC13.2@12.4,25.85 11.75,25.85 10.95,26.65 C49.2@10.4,26.65 10.4,27.6 12.3,29.5 R55.1@14.5,29.5
NetC50_1: C50.1 R56.2 | length 1.7
  L1 w0.2: R56.2@7.9,24.1 7.95,24.1 8.3,23.75 8.3,23.7 8.7,23.3 C50.1@9.25,23.3
NetC50_2: C50.2 C51.2 IC13.5 | length 3.7
  L1 w0.2: C51.2@10.15,22.3 C50.2@10.15,23.3 10.8,23.95 11.043,23.95 11.443,24.35 IC13.5@12.4,24.35
NetC57_1: C57.1 IC15.6 L6.1
NetC57_2: C57.2 IC15.7 | length 1.7
  L1 w0.254: IC15.7@41.15,7.88 41.15,8.75 41.2,8.8 C57.2@41.2,9.55
NetC67_1: C67.1 IC15.2 R59.1 R61.2 | length 5.5
  L1 w0.254: R59.1@38.93,1 38.93,1.98 C67.1@38.95,2 38.3,2.65 38.3,3.5 38.707,3.907 38.837,3.907 R61.2@39,4.07 39,4.6 39.5,5.1 IC15.2@39.5,5.61
NetC69_1: C69.1 IC15.5 | length 2.1
  L1 w0.254: IC15.5@41.15,6.08 41.15,5.25 41.3,5.1 C69.1@41.3,4.05
NetC72_2: C72.2 C73.2 D3.1 L8.1 R64.2 | length 11.8
  L1 w0.254: v1(51.65,7.37) R64.2@52.3,7.37
  L4 w0.254: v1(51.65,7.37) 53.5,9.22 v1(53.5,17.8)
NetC76_2: C76.2 IC16.6 R66.1 | length 3.8
  L1 w0.45: IC16.6@74.225,50 74.225,50.855 74.385,51.015 74.385,51.485 R66.1@74.37,51.5 75.2,51.5 75.5,51.2 C76.2@76.5,51.2
NetC80_2: C80.2 R67.1 | length 1
  L1 w0.2: C80.2@51.5,5.35 51.55,5.4 R67.1@52.43,5.4
NetC81_2: C81.2 R68.1 | length 1.4
  L1 w0.2: C81.2@58.45,3.3 58.9,3.3 59.1,3.1 R68.1@59.8,3.1
NetC82_2: C82.2 IC18.6 | length 2.1
  L1 w0.3: C82.2@56.75,30.2 56.91,30.04 57.01,30.04 57.8,29.25 IC18.6@57.8,28.55
NetC83_2: C83.2 IC17.14 R71.2 | length 4
  L1 w0.3: IC17.14@61,6.525 62.075,6.525 62.4,6.2 C83.2@63.3,6.2 63.3,6.175 63.625,5.85 63.65,5.85 63.97,5.53 R71.2@63.97,4.9
NetC86_2: C86.2 C87.2 D4.2 L9.1 R74.1 | length 15.6
  L1 w0.15: v1(64.3,2.8) 64.367,2.733 64.53,2.733 64.563,2.7 65.6,2.7 66,3.1 R74.1@66,3.93
  L4 w0.2: v1(63.3,15.2) 63.3,9.5 63.6,9.2 63.6,5.9 64.3,5.2 v1(64.3,2.8)
  other v1: 62.8,15.5 63.3,15.8 62.7,20 63.7,20 64.7,20 65.7,20 66.7,20
NetC106_1: C106.1 IC2.8 R100.1 R102.2 | length 4.7
  L1 w0.2: R102.2@10.47,35 10.47,34.505 10.892,34.083 10.892,33.8 11.017,33.675 IC2.8@11.3,33.675 12.395,33.675 12.69,33.38 12.69,33.36 R100.1@12.88,33.17 12.9,33.17 12.92,33.15 C106.1@13.9,33.15
NetC106_2: C106.2 IC2.5 R100.2 | length 2.8
  L1 w0.2: IC2.5@11.3,31.725 12.395,31.725 12.69,32.02 12.69,32.04 R100.2@12.88,32.23 ; R100.2@12.9,32.23 13.88,32.23 C106.2@13.9,32.25
NetC109_1: C109.1 IC2.1 R103.2 R105.1 | length 4.6
  L1 w0.2: C109.1@4.3,33.15 5.28,33.15 R105.1@5.3,33.17 5.32,33.17 5.51,33.36 5.51,33.38 5.805,33.675 IC2.1@6.9,33.675 7.183,33.675 7.308,33.8 7.308,34.083 7.63,34.405 R103.2@7.63,35
NetC109_2: C109.2 IC2.4 R105.2 R109.1 | length 4.5
  L1 w0.2: C109.2@4.3,32.25 4.32,32.23 R105.2@5.3,32.23 ; R105.2@5.32,32.23 5.51,32.04 5.51,32.02 5.805,31.725 IC2.4@6.9,31.725 R109.1@6.9,30
NetD3_2: D3.2 IC17.2 L7.2
NetD4_1: D4.1 IC17.20 L10.1
NetIC3_1: IC3.1 T3.1 | length 8
  L1 w0.2: IC3.1@40.3,60.005 41.995,60.005 43.55,58.45 T3.1@43.55,54.35
NetIC3_2: IC3.2 R30.2 T3.2 | length 8.8
  L1 w0.2: R30.2@40,52.8 41.3,52.8 41.65,53.15 T3.2@41.65,54.35 41.65,55.35 41.9,55.6 41.9,58.3 41.465,58.735 IC3.2@40.3,58.735
NetIC3_5: IC3.5 R18.1 R19.1 T3.3 | length 8.2
  L1 w0.2: T3.3@42.6,52.05 43.85,52.05 44.5,52.7 44.5,54.1 44.8,54.4 R19.1@45.5,54.4 ; IC3.5@45.7,56.195 45.7,55.6 45.5,55.4 R19.1@45.5,54.4 ; R18.1@47.1,54.4 R19.1@45.5,54.4
NetIC4_1: IC4.1 R6.2 | length 7.1
  L1 w0.2: IC4.1@60.4,56.705 61.695,56.705 62.5,55.9 R6.2@62.5,51.2
NetIC4_2: IC4.2 R4.2 | length 1.9
  L1 w0.2: R4.2@58.6,55.6 58.8,55.4 60.365,55.4 IC4.2@60.4,55.435
NetIC4_3: IC4.3 R10.2 | length 1.9
  L1 w0.2: R10.2@58.6,53.9 58.9,54.2 60.365,54.2 IC4.3@60.4,54.165
NetIC4_6: IC4.6 R7.1 R13.2 | length 2.8
  L1 w0.2: IC4.6@65.8,54.165 66.765,54.165 66.9,54.3 R13.2@67.53,54.3 R7.1@67.53,53.3
NetIC4_8: IC4.8 R8.2 | length 6.8
  L1 w0.2: R8.2@64.1,51.2 64.1,56 64.805,56.705 IC4.8@65.8,56.705
NetIC5_5: IC5.5 IC5.6 R23.1 | length 19.4
  L1 w0.15: IC5.5@23.2,47.595 IC5.6@23.2,48.865 25.665,48.865 27,50.2 27,51.5 27.6,52.1 32.1,52.1 33.43,53.43 R23.1@38.7,53.43
NetIC6_1: IC6.1 R2.1 R9.1 R16.2 | length 6.9
  L1 w0.2: R9.1@20.4,36.1 20.4,37.11 20.67,37.38 R16.2@20.67,37.4 20.67,38.47 21.095,38.895 IC6.1@23.2,38.895 24.765,38.895 R2.1@24.9,39.03
NetIC6_2: IC6.2 R2.2 R7.2 | length 62.9
  L1 w0.2: IC6.2@23.2,40.165 24.135,40.165 24.33,39.97 R2.2@24.9,39.97 26.53,39.97 27.3,39.2 v1(27.3,37.5) ; R7.2@68.47,53.3 70.2,53.3 v1(71.3,54.4)
  L4 w0.2: v1(27.3,37.5) 27.339,37.461 27.339,37.161 27.6,36.9 32.3,36.9 33.2,37.8 33.2,40.7 41.2,48.7 56.6,48.7 62.3,54.4 v1(71.3,54.4)
NetIC6_3: IC6.3 R11.2 R14.2 | length 2.8
  L1 w0.254: IC6.3@23.2,41.435 23.205,41.43 R14.2@24.9,41.43 R11.2@26,41.43
NetIC6_5: IC6.5 R29.2 R31.2 | length 3
  L1 w0.2: R29.2@15,42.23 R31.2@16.1,42.23 16.24,42.37 16.55,42.37 16.885,42.705 IC6.5@17.8,42.705
NetIC6_6: IC6.6 R16.1 R21.2 | length 7.2
  L1 w0.2: R21.2@16.1,41.27 16.265,41.435 IC6.6@17.8,41.435 18.865,41.435 19.73,40.57 R16.1@19.73,37.4
NetIC6_7: IC6.7 R21.1 R27.1 | length 3.1
  L1 w0.2: R27.1@15.8,39.1 15.8,40.023 15.89,40.113 15.89,40.14 16.08,40.33 R21.1@16.1,40.33 17.635,40.33 IC6.7@17.8,40.165
NetIC7_4: IC7.4 R36.1 | length 2.1
  L1 w0.4: R36.1@28.35,98.3 29.716,98.3 29.95,98.534 29.95,98.55 30.05,98.65 IC7.4@30.3,98.65
NetIC8_2: IC8.2 R40.1 R41.2 | length 2.7
  L1 w0.2: R40.1@63.37,91.4 R41.2@64.33,91.4 64.33,92.26 64.065,92.525 IC8.2@64.065,93
NetIC8_3: IC8.3 IC11.2 R43.2 | length 17.1
  L1 w0.2: IC8.3@65.335,93 65.335,92.525 65.86,92 66.176,92 66.201,91.975 66.225,91.975 67.1,91.1 75,91.1 76.17,89.93 R43.2@76.17,86.8 76.17,86.17 75.875,85.875 IC11.2@75.875,85.321
NetIC8_5: IC8.5 R13.1 R38.2 R39.2 | length 57
  L1 w0.2: IC8.5@66.605,98.4 67.2,98.4 67.8,99 R38.2@68.25,99 R39.2@68.25,98 68.25,97.98 68.44,97.79 68.446,97.79 68.836,97.4 72.9,97.4 77.2,93.1 77.2,77.8 74.1,74.7 74.1,58.8 69.6,54.3 R13.1@68.47,54.3